# Altium PCB PCB1.PcbDoc
Units mil, origin at the board's own origin, x right, y up, seen from the top; angles counter-clockwise.
Board outline 3715 x 3160 mil, 2 copper layers (Top Layer, Bottom Layer); 40 components, 24 nets, 113 pads, 0 vias.
Unrouted connection lines stored in the file: 2.
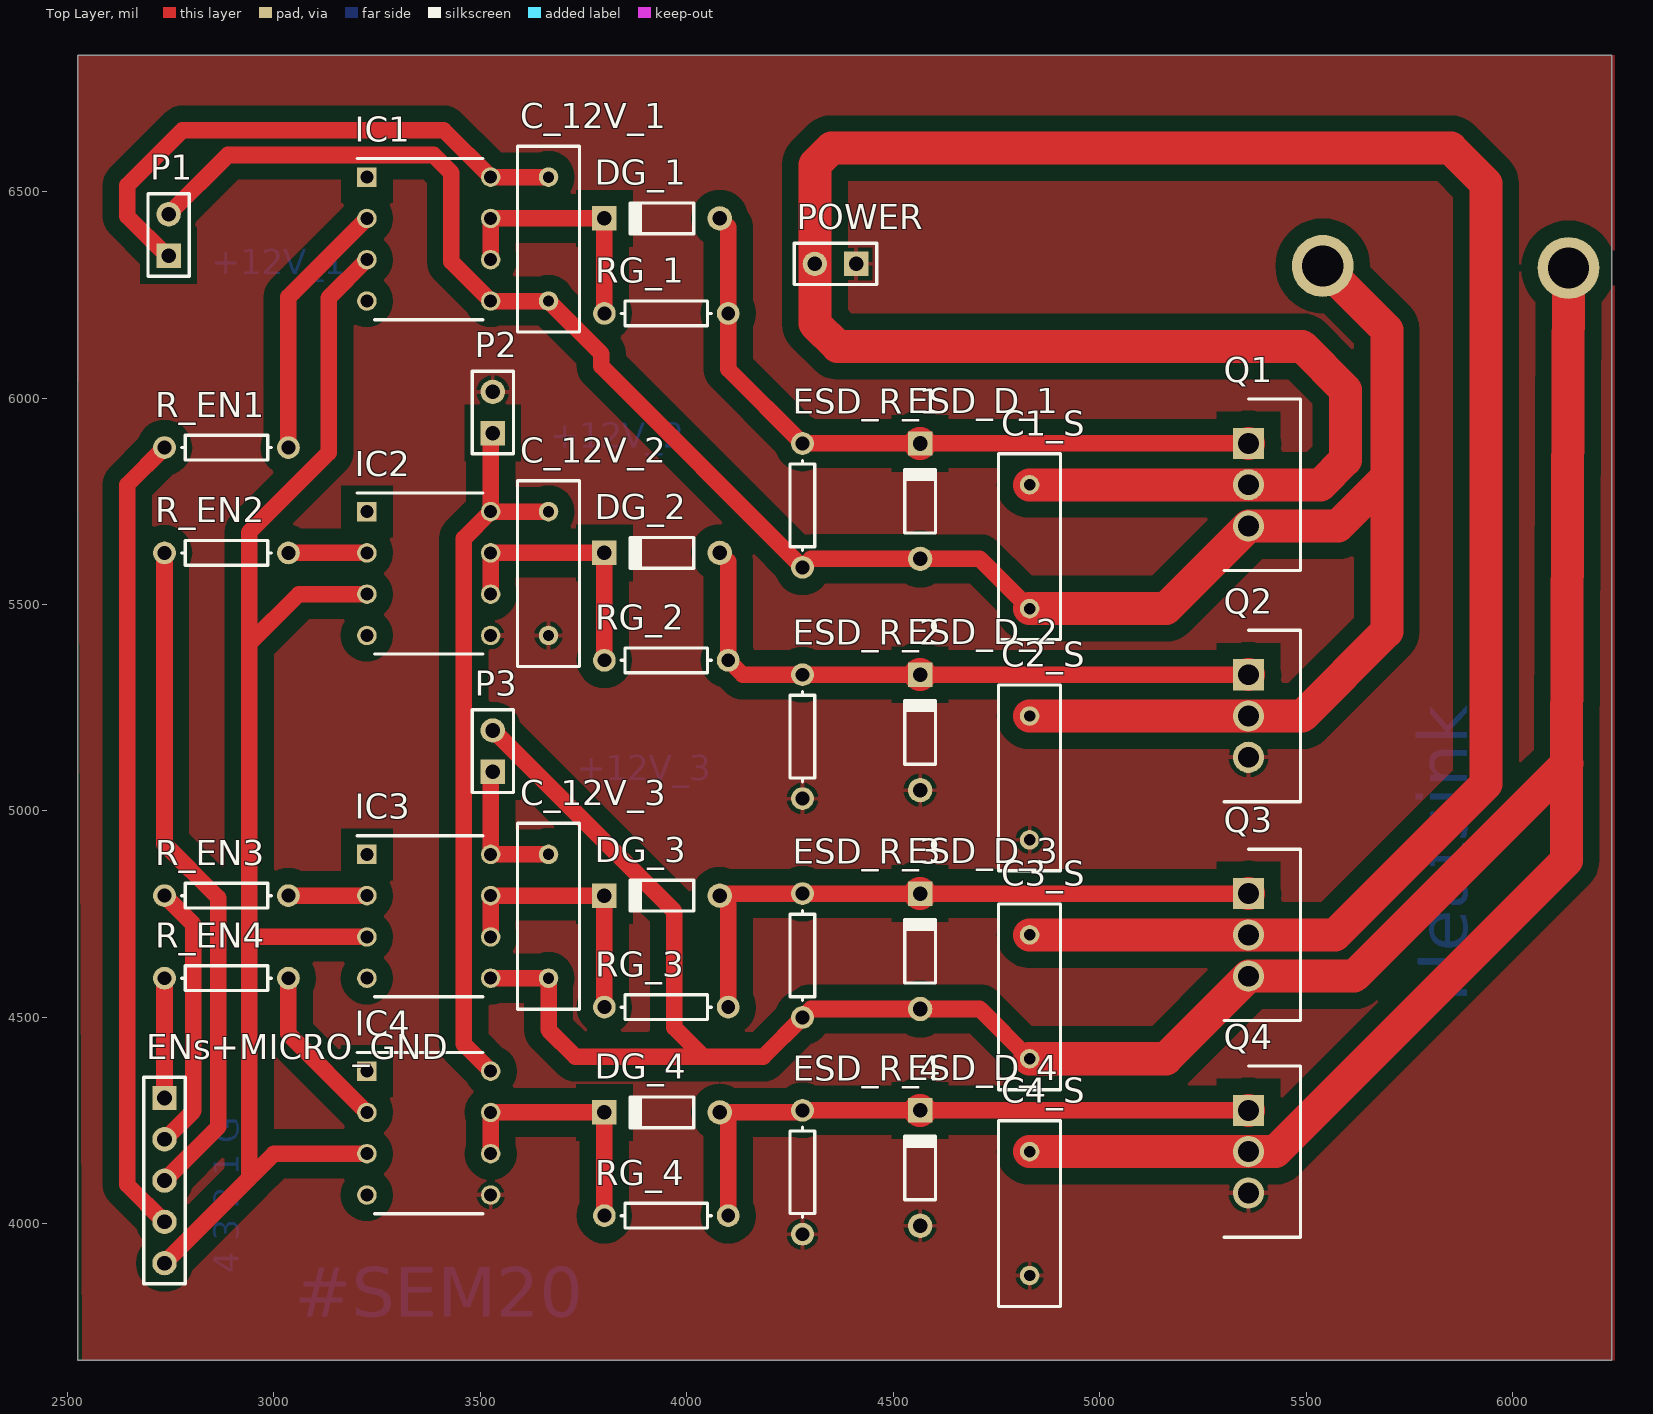
[diagram p0: Top Layer view]
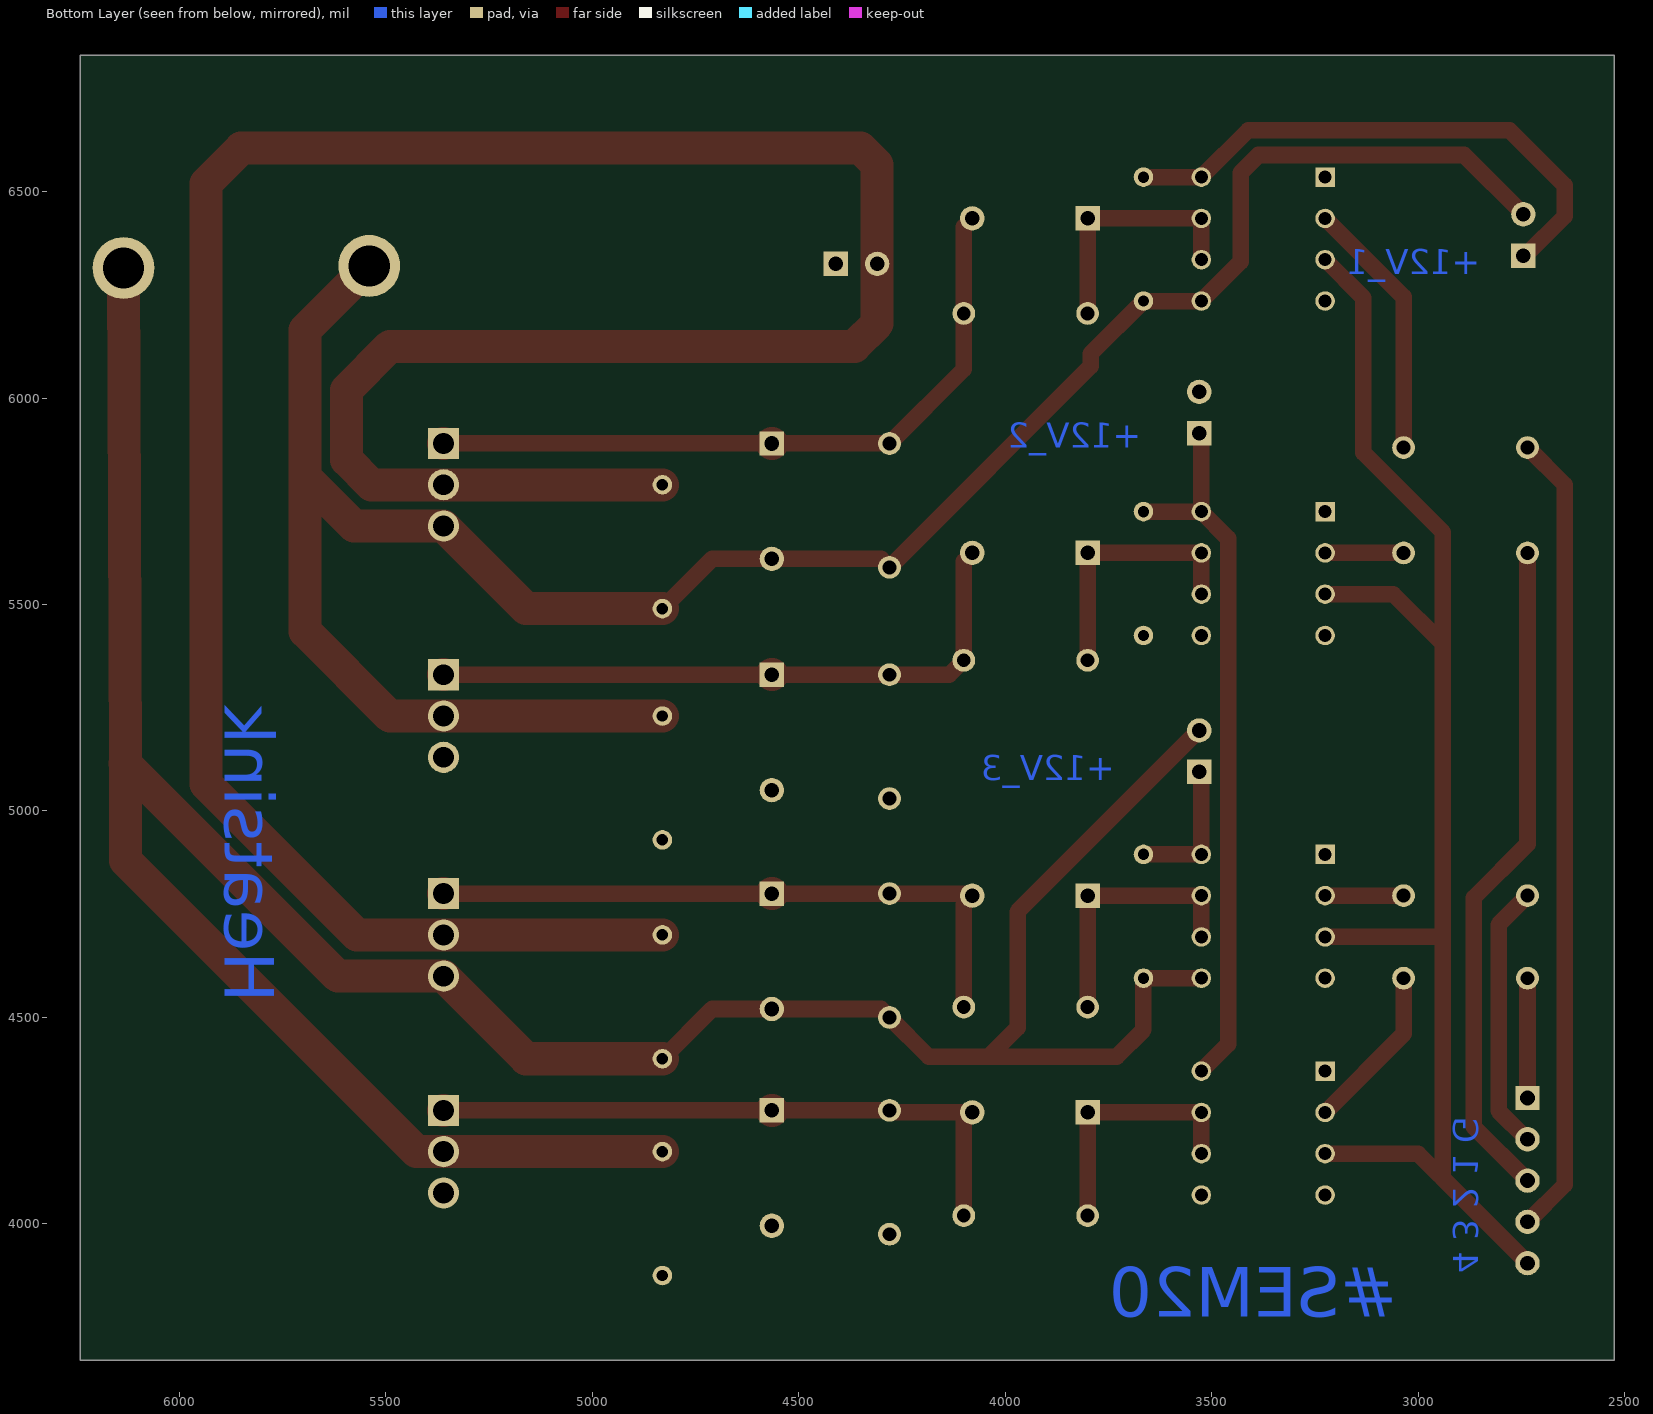
[diagram p1: Bottom Layer view, seen from below]

## Layer stack, top to bottom
Top Solder: solder mask 0.4, Solder Resist, Dk 3.5
Top Layer: signal copper 1.4
Dielectric 1: dielectric 12.6, FR-4, Dk 4.8
Bottom Layer: signal copper 1.4
Bottom Solder: solder mask 0.4, Solder Resist, Dk 3.5

## Board outline
6240,6830 6240,3670 2525,3670 2525,6830

## Design rules (kind name [scope] priority, off if disabled: settings)
Clearance [All] p1: gap=40 ignorepadtopadclearanceinfootprint=FALSE except(10: Arc-THPad Arc-Hole Track-THPad Track-Hole; 20: Arc-Arc Arc-Track Track-Track)
PolygonConnect [All] p1: connectstyle=Relief reliefconductorwidth=10 reliefentries=4 polygonreliefangle="90 Angle" airgapwidth=10
RoutingVias [All] p1: holewidth=28 width=50 viastyle="Through Hole" minholewidth=28 minwidth=50 maxholewidth=28 maxwidth=50
SolderMaskExpansion [All] p1: expansion=4
UnRoutedNet UnRoutedNet_2 [All] p1: checkbadconnections=TRUE
UnRoutedNet UnRoutedNet_1 [All] p2: checkbadconnections=TRUE
UnRoutedNet [All] p3: checkbadconnections=TRUE
Width [All] p1: maxlimit=100 minlimit=40 preferedwidth=40
29 further rules are at their usual default settings.

## Components (designator, comment, footprint, x,y, rotation, side; value= is the part's Value field where it differs from the comment)
C1_S "Cap" RAD-0.3 4830,5640 r90 top value=100pF
C2_S "Cap" RAD-0.3 4830,5080 r90 top value=100pF
C3_S "Cap" RAD-0.3 4830,4550 r90 top value=100pF
C4_S "Cap" RAD-0.3 4830,4025 r90 top value=100pF
C_12V_1 "Cap" RAD-0.3 3665,6385 r90 top value=100pF
C_12V_2 "Cap" RAD-0.3 3665,5575 r90 top value=100pF
C_12V_3 "Cap" RAD-0.3 3665,4745 r90 top value=100pF
DG_1 "Diode 1N914" DO-35 3940,6435 r180 top
DG_2 "Diode 1N914" DO-35 3940,5625 r180 top
DG_3 "Diode 1N914" DO-35 3940,4795 r180 top
DG_4 "Diode 1N914" DO-35 3940,4270 r180 top
ENs+MICRO_GND "Header 5" HDR1X5 2735,4305 r270 top
ESD_D_1 "Diode 1N914" DO-35 4565,5750.24 r90 top
ESD_D_2 "Diode 1N914" DO-35 4565,5190.24 r90 top
ESD_D_3 "Diode 1N914" DO-35 4565,4660.24 r90 top
ESD_D_4 "Diode 1N914" DO-35 4565,4135.24 r90 top
ESD_R_1 "Res1" AXIAL-0.3 4280,5740 r270 top value=1K
ESD_R_2 "Res1" AXIAL-0.3 4280,5180 r270 top value=1K
ESD_R_3 "Res1" AXIAL-0.3 4280,4650 r270 top value=1K
ESD_R_4 "Res1" AXIAL-0.3 4280,4125 r270 top value=1K
IC1 "TLP250(F)" DIP762W60P254L966H485Q8N 3375,6385 r0 top
IC2 "TLP250(F)" DIP762W60P254L966H485Q8N 3375,5575 r0 top
IC3 "TLP250(F)" DIP762W60P254L966H485Q8N 3375,4745 r0 top
IC4 "TLP250(F)" DIP762W60P254L966H485Q8N 3375,4220 r0 top
P1 "Header 2" HDR1X2 2745,6345 r90 top
P2 "Header 2" HDR1X2 3530,5915 r90 top
P3 "Header 2" HDR1X2 3530,5095 r90 top
POWER "Header 2" HDR1X2 4410,6325 r180 top
Q1 "IRF530NPBF" TO254P469X1042X1967-3P 5360,5890 r270 top
Q2 "IRF530NPBF" TO254P469X1042X1967-3P 5360,5330 r270 top
Q3 "IRF530NPBF" TO254P469X1042X1967-3P 5360,4800 r270 top
Q4 "IRF530NPBF" TO254P469X1042X1967-3P 5360,4275 r270 top
R_EN1 "Res1" AXIAL-0.3 2885,5880 r180 top value=1K
R_EN2 "Res1" AXIAL-0.3 2885,5625 r180 top value=1K
R_EN3 "Res1" AXIAL-0.3 2885,4795 r180 top value=1K
R_EN4 "Res1" AXIAL-0.3 2885,4595 r180 top value=1K
RG_1 "Res1" AXIAL-0.3 3950.24,6205 r0 top value=1K
RG_2 "Res1" AXIAL-0.3 3950.24,5365 r0 top value=1K
RG_3 "Res1" AXIAL-0.3 3950.24,4525 r0 top value=1K
RG_4 "Res1" AXIAL-0.3 3950.24,4020 r0 top value=1K

## Footprints (in the part's own frame and the unit in brackets; to place one, negate y for a bottom-side part, rotate by r counter-clockwise, add the part's x,y. Pads: shape width x height; smd on the part's side, far side on the other; paste and mask are expansions set on the pad)
AXIAL-0.3 [mm] "Axial Device, Thru-Hole; 2 Leads; 0.3 in Pin Spacing"
  round 1.4 hole 0.85: 1(-3.81,0) 2(3.81,0)
  silkscreen extent -2.77,-0.76 2.77,0.76
DIP762W60P254L966H485Q8N [mm]
  rect 1.2x1.2 hole 0.8: 1(-3.81,3.81)
  round 1.2 hole 0.8: 2(-3.81,1.27) 3(-3.81,-1.27) 4(-3.81,-3.81) 5(3.81,-3.81) 6(3.81,-1.27) 7(3.81,1.27) 8(3.81,3.81)
  silkscreen extent -4.41,-4.95 3.32,4.95, body extent -3.96,-4.83 3.96,4.83, height 4.85
DO-35 [mm] "Diode, Axial; Body 3.8 x 1.9 mm (LxDia. max), Lead Dia. 0.53 mm (max)"
  round 1.5 hole 0.9: 1(-3.55,0)
  rect 1.5x1.5 hole 0.9: 2(3.55,0)
  silkscreen extent -1.95,-0.95 2.05,0.95
HDR1X2 [mm] "Connector; Header; 2 Position"
  rect 1.5x1.5 hole 0.9: 1(0,0)
  round 1.5 hole 0.9: 2(2.54,0)
  silkscreen extent -1.27,-1.27 3.81,1.27
HDR1X5 [mm] "Connector; Header; 5 Position"
  rect 1.5x1.5 hole 0.9: 1(0,0)
  round 1.5 hole 0.9: 2(2.54,0) 3(5.08,0) 4(7.62,0) 5(10.16,0)
  silkscreen extent -1.27,-1.27 11.43,1.27
RAD-0.3 [mm] "Radial Cap, Thru-Hole; 2 Leads; 0.3 in Pin Spacing"
  round 1.2 hole 0.7: 1(-3.81,0) 2(3.81,0)
  silkscreen extent -5.71,-1.91 5.71,1.91
TO254P469X1042X1967-3P [mm]
  rect 1.92x1.92 hole 1.28: 1(0,0)
  round 1.92 hole 1.28: 2(2.54,0) 3(5.08,0)
  silkscreen extent -2.73,-1.5 7.81,3.19, body extent -2.67,-1.5 7.75,3.19, height 18.84

## Part data
C1_S C2_S C3_S C4_S C_12V_1 C_12V_2 C_12V_3: "Capacitor", LatestRevisionDate=17-Jul-2002, LatestRevisionNote="Re-released for DXP Platform.", PackageDescription="Radial Cap, Thru-Hole; 2 Leads; 0.3 in Pin Spacing", PackageReference=RAD-0.3, Published=8-Jun-2000, Publisher="Altium Limited"
DG_1 DG_2 DG_3 DG_4 ESD_D_1 ESD_D_2 ESD_D_3 ESD_D_4: "High Conductance Fast Diode", Code_JEDEC=DO-204-AH, ComponentLink1Description="Manufacturer Link", ComponentLink1URL=http://www.fairchildsemi.com/, ComponentLink2Description=Datasheet, ComponentLink2URL=http://www.fairchildsemi.com/ds/1N%2F1N4448.pdf, DatasheetVersion=1997, LatestRevisionDate=17-Jul-2002, LatestRevisionNote="Re-released for DXP Platform.", PackageDescription="Diode, Axial; Body 3.8 x 1.9 mm (LxDia. max), Lead Dia. 0.53 mm (max)", PackageReference=DO-35, Published=8-Jun-2000, Publisher="Altium Limited"
ENs+MICRO_GND: "Header, 5-Pin", LatestRevisionDate=17-Jul-2002, LatestRevisionNote="Re-released for DXP Platform.", Publisher="Altium Limited"
ESD_R_1 ESD_R_2 ESD_R_3 ESD_R_4 R_EN1 R_EN2 R_EN3 R_EN4 RG_1 RG_2 RG_3 RG_4: "Resistor", LatestRevisionDate=17-Jul-2002, LatestRevisionNote="Re-released for DXP Platform.", PackageDescription="Axial Device, Thru-Hole; 2 Leads; 0.3 in Pin Spacing", PackageReference=AXIAL-0.3, Published=8-Jun-2000, Publisher="Altium Limited"
IC1 IC2 IC3 IC4: "Integrated Circuit", Manufacturer_Name=Toshiba, Mouser Part Number=757-TLP250(F), RS Part Number=1000151P, Datasheet Link=http://docs-emea.rs-online.com/webdocs/08df/0900766b808dfee1.pdf, Height=4.85mm, Manufacturer_Part_Number=TLP250(F), Mouser Price/Stock=https://www.mouser.com/Search/Refine.aspx?Keyword=757-TLP250%28F%29, RS Price/Stock=http://uk.rs-online.com/web/p/products/1000151P
P1 P2 P3 POWER: "Header, 2-Pin", LatestRevisionDate=17-Jul-2002, LatestRevisionNote="Re-released for DXP Platform.", Publisher="Altium Limited"
Q1 Q2 Q3 Q4: "MOSFET (N-Channel)", Manufacturer_Name=Infineon, Mouser Part Number=942-IRF530NPBF, RS Part Number=5410755P, Allied_Number=70016965, Allied Price/Stock=https://www.alliedelec.com/infineon-irf530npbf/70016965/, Datasheet Link=https://www.arrow.com/en/products/irf530npbf/infineon-technologies-ag, Height=4.69mm, Manufacturer_Part_Number=IRF530NPBF, Mouser Price/Stock=https://www.mouser.com/Search/Refine.aspx?Keyword=942-IRF530NPBF, RS Price/Stock=http://uk.rs-online.com/web/p/products/5410755P

## Free pads (board coordinates)
  round 150 hole 100: 14(5540,6320) 14(6135,6315)

## Nets (pads, with @x,y where several pads share a name; then routed paths per layer and width w, separated by ;. In a path a pad name is that pad's centre, name@x,y a point inside that pad or via, vN(x,y) a via of type N, cw(c..) or ccw(c..) an arc to the next point about the centre after c; other vN are vias at no path point)
GND: C2_S.1 C4_S.1 C_12V_2.1 ESD_D_2.1 ESD_D_4.1 ESD_R_2.2 ESD_R_4.2 IC2.5 IC4.5 P2.2 POWER.1 Q2.3 Q4.3
NetC1_S_1: C1_S.1 C2_S.2 C_12V_1.1 ESD_D_1.1 ESD_R_1.2 IC1.5 P1.2 pad.14@5540,6320 Q1.3 Q2.2 | length 5656.2
  Top Layer w40: P1.2 2888.62,6588.62 3386.53,6588.62 3430,6545.15 3430,6330 IC1.5 C_12V_1.1 3792.5,6107.5 3792.5,6077.5 ESD_R_1.2 4300.47,5610.47 ESD_D_1.1 4709.53,5610.47 C1_S.1
  Top Layer w80: C2_S.2 Q2.2 5490,5230 5695,5435 5695,5808.58 ; C1_S.1 5160,5490 Q1.3 5576.42,5690 5695,5808.58 ; pad.14@5540,6320 5695,6165 5695,5808.58
NetC3_S_1: C3_S.1 C4_S.2 C_12V_3.1 ESD_D_3.1 ESD_R_3.2 IC3.5 P3.2 pad.14@6135,6315 Q3.3 Q4.2 | length 7180.8
  Top Layer w40: IC3.5 C_12V_3.1 3665,4470 3730,4405 4040,4405 ; P3.2 3531.48,5195 3970,4756.48 3970,4475 4040,4405 ; C3_S.1 4709.53,4520.47 ESD_D_3.1 4300.47,4520.47 ESD_R_3.2 4185,4405 4040,4405
  Top Layer w80: C4_S.2 Q4.2 5425,4175 6130,4880 6130.82,5114.96 ; C3_S.1 5160,4400 Q3.3 5615.86,4600 6130.82,5114.96 ; pad.14@6135,6315 6130.82,5114.96
NetC_12V_1_2: C_12V_1.2 IC1.8 P1.1 | length 1336.6
  Top Layer w40: P1.1 2740.27,6345 2645,6440.27 2645,6515 2778.62,6648.62 3411.38,6648.62 IC1.8 C_12V_1.2
NetC_12V_2_2: C_12V_2.2 IC2.8 IC4.8 P2.1 | length 1740.9
  Top Layer w40: IC4.8 3460,4435 3460,5660 IC2.8 ; P2.1 3525,5910 IC2.8 ; C_12V_2.2 IC2.8
NetC_12V_3_2: C_12V_3.2 IC3.8 P3.1 | length 344.1
  Top Layer w40: P3.1@3535,5095 3525,5085 IC3.8 C_12V_3.2
NetDG_1_1: DG_1.1 ESD_D_1.2 ESD_R_1.1 Q1.1 RG_1.2 | length 1707.9
  Top Layer w40: DG_1.1 4100.24,6414.53 RG_1.2 4100.24,6069.76 ESD_R_1.1 ESD_D_1.2 Q1.1
NetDG_1_2: DG_1.2 IC1.6 IC1.7 RG_1.1 | length 605.2
  Top Layer w40: IC1.6 IC1.7 DG_1.2 RG_1.1
NetDG_2_1: DG_2.1 ESD_D_2.2 ESD_R_2.1 Q2.1 RG_2.2 | length 1542.7
  Top Layer w40: DG_2.1 4100.24,5604.53 RG_2.2 4135.24,5330 ESD_R_2.1 ESD_D_2.2 Q2.1
NetDG_2_2: DG_2.2 IC2.6 IC2.7 RG_2.1 | length 635.2
  Top Layer w40: IC2.6 IC2.7 DG_2.2 RG_2.1
NetDG_3_1: DG_3.1 ESD_D_3.2 ESD_R_3.1 Q3.1 RG_3.2 | length 1560.8
  Top Layer w40: RG_3.2 4100.24,4774.53 DG_3.1 4084.76,4800 ESD_R_3.1 ESD_D_3.2 Q3.1
NetDG_3_2: DG_3.2 IC3.6 IC3.7 RG_3.1 | length 645.2
  Top Layer w40: IC3.6 IC3.7 DG_3.2 RG_3.1
NetDG_4_1: DG_4.1 ESD_D_4.2 ESD_R_4.1 Q4.1 RG_4.2 | length 1540.8
  Top Layer w40: RG_4.2 4100.24,4249.53 DG_4.1 4275,4270 ESD_R_4.1 ESD_D_4.2 Q4.1
NetDG_4_2: DG_4.2 IC4.6 IC4.7 RG_4.1 | length 625.2
  Top Layer w40: IC4.6 IC4.7 DG_4.2 RG_4.1
NetENs+MICRO_GND_1: ENs+MICRO_GND.1 R_EN4.2 | length 290
  Top Layer w40: ENs+MICRO_GND.1 R_EN4.2
NetENs+MICRO_GND_2: ENs+MICRO_GND.2 R_EN3.2 | length 648.9
  Top Layer w40: ENs+MICRO_GND.2 2736.48,4205 2805,4273.52 2805,4725 R_EN3.2
NetENs+MICRO_GND_3: ENs+MICRO_GND.3 R_EN2.2 | length 1627.7
  Top Layer w40: ENs+MICRO_GND.3 2865,4235 2865,4790 2735,4920 R_EN2.2
NetENs+MICRO_GND_4: ENs+MICRO_GND.4 R_EN1.2 | length 1949.6
  Top Layer w40: ENs+MICRO_GND.4 2645,4095 2645,5790 R_EN1.2
NetENs+MICRO_GND_5: ENs+MICRO_GND.5 IC1.3 IC2.3 IC3.3 IC4.3 | length 3562.5
  Top Layer w40: ENs+MICRO_GND.5 2940,4110 2940,4125 ; IC4.3 3000,4170 2947.5,4117.5 2940,4125 ; IC3.3 2940,4695 ; IC2.3 3060,5525 2940,5405 ; IC1.3 3132.5,6242.5 3132.5,5867.5 2940,5675 2940,5405 ; 2940,4125 2940,4695 ; 2940,4695 2940,5405
NetIC1_2: IC1.2 R_EN1.1 | length 633.7
  Top Layer w40: R_EN1.1 3035,6245 IC1.2
NetIC2_2: IC2.2 R_EN2.1 | length 190
  Top Layer w40: R_EN2.1 IC2.2
NetIC3_2: IC3.2 R_EN3.1 | length 190
  Top Layer w40: R_EN3.1 IC3.2
NetIC4_2: IC4.2 R_EN4.1 | length 403.7
  Top Layer w40: R_EN4.1 3035,4460 IC4.2
VCC: C1_S.2 C3_S.2 POWER.2 Q1.2 Q3.2 | length 7084.1
  Top Layer w80: C3_S.2 Q3.2 5570,4700 5935,5065 5935,5150 5935,6325 5935,6520 5850,6605 4350,6605 4310,6565 POWER.2 4310,6180 4365,6125 5490,6125 5595,6020 5595,5850 5535,5790 Q1.2 C1_S.2
pads on no net: IC1.1 IC1.4 IC2.1 IC2.4 IC3.1 IC3.4 IC4.1 IC4.4

## Polygon pours and split planes (outlines as drawn)
GND on Top Layer "Top Layer-GND" (solid, pour order 28): 2523.88,6830 2536.2,3670 6246.94,3670 6246.94,6830
no net on Top Layer "Top Layer-No Net 1" (solid, pour order 14): 4150,5585
no net on Top Layer "Top Layer-No Net" (solid, pour order 8): 5445,5115

## Other copper
Bottom Layer:
  text "+12V_1" at 2850,6300 h60
  text "+12V_2" at 3670,5880 h60
  text "+12V_3" at 3735,5075 h60
  text "Heatsink" at 5890,4535 h120 r90
  text "4 3 2 1 G" at 2915,3880 h60 r90
  text "#SEM20" at 3050,3775 h120

## Silkscreen, mask and mechanical layers (free items; w line width, h text height)
Mechanical 13:
  lines w40: 5340,6165 6225,6165 6230,6160 6230,3690 6225,3695 5080,3695 5070,3705 5070,6165 5075,6165 5360,6165